# EAGLE board LED Driver R1.4 (10cm x 7cm) (EAGLE 6.2)
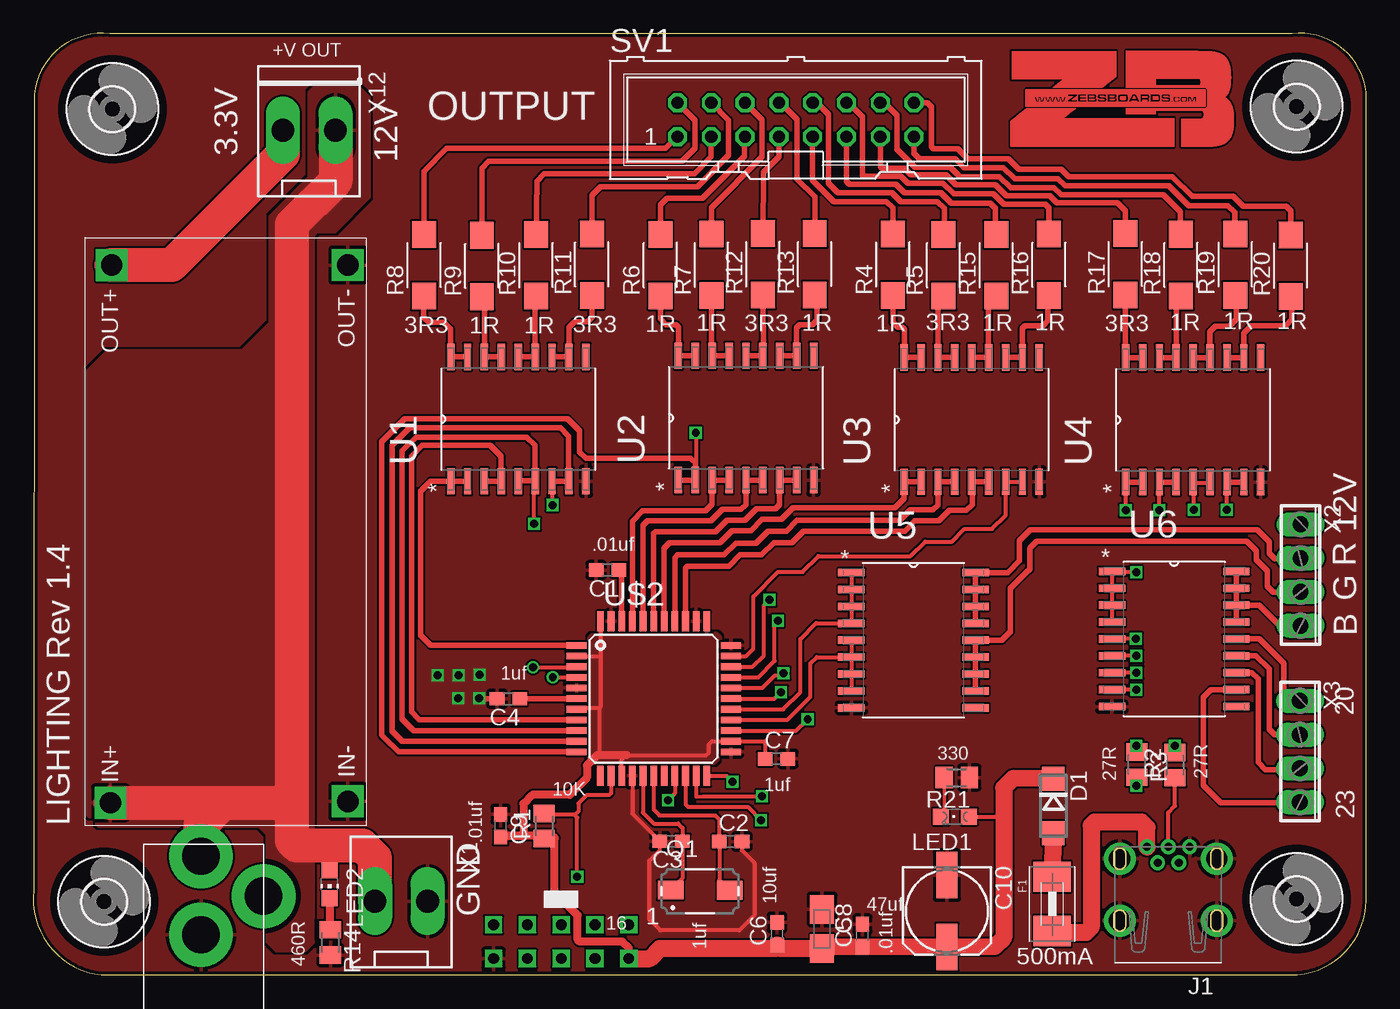
[diagram p0: board, top side]
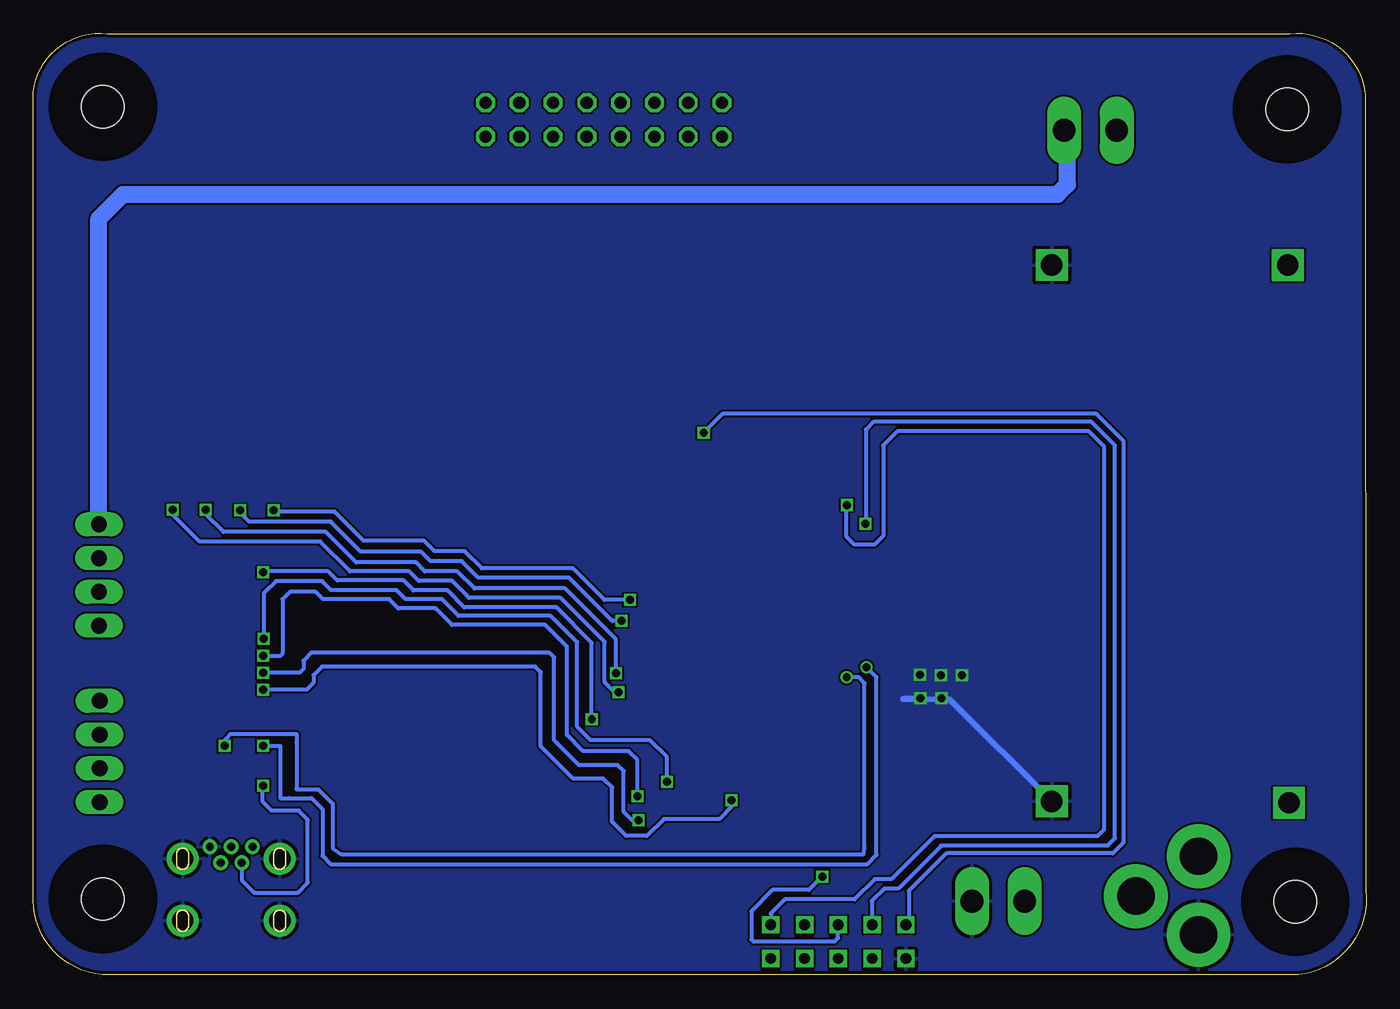
[diagram p1: board, bottom side, seen from below]

Size 100.2 x 70.75 mm. Coordinates in mm from the lower left corner, seen from the top.
Outline: 0.03,6.35 arc90 5.11,0 94.49,0 arc90 100.2,5.61 100.2,66.33 arc90 94.64,70.72 5.74,70.72 arc90 0.07,66.17 0.03,6.35
Copper layers (1*16): Top 0.035mm / dielectric 1.5mm / Bottom 0.035mm
Design rules: minimum track width 6mil, minimum drill 12mil, track to track 6mil, track to pad 6mil, pad to pad 6mil, via to via 6mil, smd to smd 0mil, copper to edge 10mil, drill to drill 10mil, minimum pad ring 10mil, minimum via ring 6mil, stop-mask expansion 2mil, vias tented up to drill 100mil, thermal gap 10mil

## Footprints (pad centres in the part's own frame; a part is rotated, then mirrored left to right if it is on the bottom)
C0603 = smd 1.1 x 1: 1 -0.85,0; 2 0.85,0
A/3216-18W = smd 2.15 x 1.8: + 1.475,0; - -1.475,0
153CLV-0605 = smd 3.5 x 1.6: + 2.7,0; - -2.7,0
DO214AC = smd 1.8 x 1.7: A 2.05,0; C -2.05,0
1812 = smd 2.286 x 2.794: 1 -2.046,0; 2 2.046,0
3,2 = hole 3.2: 0,0
651005136521 = drill 0.6: 1 1.6,-0.9; 2 0.8,0.3; 3 0,-0.9; 4 -0.8,0.3; 5 -1.6,-0.9 | drill 1.6: 6 -3.65,0; 7 -3.65,4.65; 8 3.65,4.65; 9 3.65,0
CHIPLED_0805 = smd 1.2 x 1.2: A 0,-1.05; C 0,1.05
CHIP-LED0805 = smd 1.2 x 1.2: A 0,-1.05; C 0,1.05
CTS406 = smd 1.9 x 1.4: 1 -2.2,0.07; 3 2.233,0.062
M0805 = smd 1.3 x 1.6: 1 -0.95,0; 2 0.95,0
R2010W = smd 2 x 1.8: 1 -2.311,0; 2 2.311,0
ML16 = drill 0.914 octagon: 1 -8.89,-1.27; 2 -8.89,1.27; 3 -6.35,-1.27; 4 -6.35,1.27; 5 -3.81,-1.27; 6 -3.81,1.27; 7 -1.27,-1.27; 8 -1.27,1.27; 9 1.27,-1.27; 10 1.27,1.27; 11 3.81,-1.27; 12 3.81,1.27; 13 6.35,-1.27; 14 6.35,1.27; 15 8.89,-1.27; 16 8.89,1.27
SOIC127P1030X265-18N = smd 1.981 x 0.559: 1 -4.674,5.08; 2 -4.674,3.81; 3 -4.674,2.54; 4 -4.674,1.27; 5 -4.674,0; 6 -4.674,-1.27; 7 -4.674,-2.54; 8 -4.674,-3.81; 9 -4.674,-5.08; 10 4.674,-5.08; 11 4.674,-3.81; 12 4.674,-2.54; 13 4.674,-1.27; 14 4.674,0; 15 4.674,1.27; 16 4.674,2.54; 17 4.674,3.81; 18 4.674,5.08
DC1CONVERTER = drill 1.6 square: IN+ 20.839,-9.498; IN- 20.736,8.343; OUT+ -19.563,-9.402; OUT- -19.567,8.343
TQFP44 = smd 1.5 x 0.5: 1 -5.8,4; 2 -5.8,3.2; 3 -5.8,2.4; 4 -5.8,1.6; 5 -5.8,0.8; 6 -5.8,0; 7 -5.8,-0.8; 8 -5.8,-1.6; 9 -5.8,-2.4; 10 -5.8,-3.2; 11 -5.8,-4; 23 5.8,-4; 24 5.8,-3.2; 25 5.8,-2.4; 26 5.8,-1.6; 27 5.8,-0.8; 28 5.8,0; 29 5.8,0.8; 30 5.8,1.6; 31 5.8,2.4; 32 5.8,3.2; 33 5.8,4 | smd 0.5 x 1.5: 12 -4,-5.8; 13 -3.2,-5.8; 14 -2.4,-5.8; 15 -1.6,-5.8; 16 -0.8,-5.8; 17 0,-5.8; 18 0.8,-5.8; 19 1.6,-5.8; 20 2.4,-5.8; 21 3.2,-5.8; 22 4,-5.8; 34 4,5.8; 35 3.2,5.8; 36 2.4,5.8; 37 1.6,5.8; 38 0.8,5.8; 39 0,5.8; 40 -0.8,5.8; 41 -1.6,5.8; 42 -2.4,5.8; 43 -3.2,5.8; 44 -4,5.8
10PICSP = drill 0.8 square: P$1 5.08,0; P$2 5.08,-2.54; P$3 2.54,0; P$4 2.54,-2.54; P$5 0,0; P$6 0,-2.54; P$7 -2.54,0; P$8 -2.54,-2.54; P$9 -5.08,0; P$10 -5.08,-2.54
PJ-102A = drill 2.8 pad 4.8: RING 0.1,-3.39; RING_SW -4.6,-6.29; TIP 0.1,-9.29
KK-156-2 = drill 1.7 pad 2.184 long: 1 -1.98,0; 2 1.98,0
4POL254 = drill 1.2 long: 1 -3.81,0; 2 -1.27,0; 3 1.27,0; 4 3.81,0

## Placement (x,y rotation side)
C1  0.1uf  [C0603]  43.16,30.42 180 top
C2  22pf  [C0603]  52.42,10.02 0 top
C3  22pf  [C0603]  47.95,10.05 180 top
C4  1uf  [C0603]  35.72,20.75 180 top
C5  1uf  [C0603]  62.32,2.96 90 top
C6  0.1uf  [C0603]  55.91,3.09 90 top
C7  1uf  [C0603]  55.87,16.23 0 top
C8  10uf  [A/3216-18W]  59.29,3.45 270 top
C9  0.1uf  [C0603]  35.12,11.21 270 top
C10  [153CLV-0605]  68.68,4.8 270 top
D1  [DO214AC]  76.67,12.7 270 top
F1  [1812]  76.59,5.33 270 top
H1  MOUNT-HOLE3.2  [3,2]  5.95,65.06 0 top
H2  MOUNT-HOLE3.2  [3,2]  5.32,5.5 0 top
H3  MOUNT-HOLE3.2  [3,2]  94.96,5.7 0 top
H4  MOUNT-HOLE3.2  [3,2]  94.96,65.24 0 top
J1  [651005136521]  85.32,8.73 180 top
LED1  [CHIPLED_0805]  69.29,11.89 90 top
LED2  [CHIP-LED0805]  22.27,6.82 180 top
Q1  16mhz  [CTS406]  50.11,6.3 0 top
R1  10K  [M0805]  38.4,11.19 90 top
R2  22  [M0805]  85.81,15.77 90 top
R3  22  [M0805]  82.96,15.79 270 top
R4  1R  [R2010W]  64.62,53.37 90 top
R5  3R3  [R2010W]  68.42,53.32 90 top
R6  1R  [R2010W]  47.13,53.33 90 top
R7  1R  [R2010W]  50.98,53.35 90 top
R8  3R3  [R2010W]  29.37,53.32 90 top
R9  1R  [R2010W]  33.72,53.27 90 top
R10  1R  [R2010W]  37.8,53.32 90 top
R11  3R3  [R2010W]  41.99,53.37 90 top
R12  3R3  [R2010W]  54.85,53.4 90 top
R13  1R  [R2010W]  58.74,53.4 90 top
R14  200  [M0805]  22.34,2.45 270 top
R15  1R  [R2010W]  72.38,53.32 90 top
R16  1R  [R2010W]  76.35,53.36 90 top
R17  3R3  [R2010W]  82.09,53.4 90 top
R18  1R  [R2010W]  86.27,53.34 90 top
R19  1R  [R2010W]  90.35,53.37 90 top
R20  1R  [R2010W]  94.51,53.29 90 top
R21  [M0805]  69.42,14.83 180 top
SV1  ML16E  [ML16]  57.31,64.26 0 top
U1  ULN2803ADW  [SOIC127P1030X265-18N]  36.46,41.76 90 top
U2  ULN2803ADW  [SOIC127P1030X265-18N]  53.57,41.85 90 top
U3  ULN2803ADW  [SOIC127P1030X265-18N]  70.54,41.72 90 top
U4  ULN2803ADW  [SOIC127P1030X265-18N]  87.18,41.71 90 top
U5  ULN2803ADW  [SOIC127P1030X265-18N]  66.16,25.15 0 top
U6  ULN2803ADW  [SOIC127P1030X265-18N]  85.76,25.24 0 top
U$1  DC1ACONVERTER  [DC1CONVERTER]  15.3,33.77 270 top
U$2  ATMEGA32U4-AU  [TQFP44]  46.63,20.76 0 top
U$3  [ZB_LOGO_SMALL_COPPER]  71.01,60.84 0 top
U$4  10PICSP  [10PICSP]  39.68,3.77 0 top
U$5  2.1MMJACKTHM  [PJ-102A]  12.7,-0.37 180 top
X1  [KK-156-2]  27.66,5.54 180 top
X2  [4POL254]  95.26,30.05 270 top
X3  [4POL254]  95.21,16.78 270 top
X12  [KK-156-2]  20.73,63.47 180 top

## Library data of the parts
C1-C3 C6 C9 F1 U$2 U$5 = adafruit
C4 C5 C7 C8 C10 R1-R21 = resistor
D1 = diode
H1-H4 = holes
J1 = Wurth_Elektronik_Electromechanic_Input-Output_Connectors_rev16b
LED1 LED2 = led
Q1 = crystal; OC_FARNELL: unknown; OC_NEWARK: unknown
SV1 = con-harting-ml; OC_FARNELL: unknown; OC_NEWARK: unknown
U1-U6 = ULNsmd; MPN: ULN2803ADW; OC_FARNELL: 1652419; OC_NEWARK: 69K0711; PACKAGE: SOIC-18; SUPPLIER: TEXAS INSTRUMENTS
U$1 = DC 1A Converter
U$3 = zebsboardslrg
U$4 = 10p ISCP
X1 X12 = con-molex; OC_FARNELL: unknown; OC_NEWARK: unknown
X2 X3 = con-phoenix-254; OC_FARNELL: unknown; OC_NEWARK: unknown

## Nets
+3V3: C1.1 U$2.42
+12V: LED2.A U$1.IN+ U$5.TIP X1.2 X2.1 X12.1
D1: U1.1 U1.2 U$2.1
D2: U1.3 U1.4 U$2.8
D3: U1.5 U1.6 U$2.9 U$4.P$7
D4: U1.7 U1.8 U$2.10 U$4.P$1
D5: U2.1 U2.2 U$2.11 U$4.P$9
D6: U2.3 U2.4 U$2.41
D7: U2.5 U2.6 U$2.40
D8: U2.7 U2.8 U$2.39
D9: U3.1 U3.2 U$2.38
D10: U3.3 U3.4 U$2.37
D11: U3.5 U3.6 U$2.36
D12: U3.7 U3.8 U$2.32
D13: U4.1 U4.2 U$2.31
D14: U4.3 U4.4 U$2.30
D15: U4.5 U4.6 U$2.29
D16: U4.7 U4.8 U$2.28
D17: U5.1 U5.2 U5.3 U5.4 U$2.27
D18: U5.5 U5.6 U5.7 U5.8 U$2.26
D19: U6.1 U6.2 U6.3 U6.4 U$2.25
D20: U6.5 U$2.22
D21: U6.6 U$2.21
D22: U6.7 U$2.20
D23: U6.8 U$2.19
D24: U$2.18
D25: U$2.12
D+: R2.2 U$2.4
D-: R3.1 U$2.3
GND: C1.2 C2.2 C3.2 C4.2 C5.2 C6.2 C7.2 C8.- C9.1 C10.- J1.5 J1.6 J1.7 J1.8 J1.9 R14.2 R21.1 U1.9 U2.9 U3.9 U4.9 U5.9 U6.9 U$1.IN- U$1.OUT- U$2.5 U$2.15 U$2.23 U$2.33 U$2.35 U$2.43 U$4.P$10 U$5.RING X1.1
N$1: R9.1 U1.15 U1.16
N$2: R8.2 SV1.1
N$3: R10.2 SV1.3
N$4: R11.1 U1.11 U1.12
N$5: R4.1 U3.17 U3.18
N$6: R5.2 SV1.10
N$7: R15.1 U3.13 U3.14
N$8: R8.1 U1.17 U1.18
N$9: R7.1 U2.15 U2.16
N$10: R6.2 SV1.5
N$11: R12.2 SV1.7
N$12: R13.1 U2.11 U2.12
N$13: R9.2 SV1.2
N$14: R10.1 U1.13 U1.14
N$15: R11.2 SV1.4
N$16: R6.1 U2.17 U2.18
N$17: R5.1 U3.15 U3.16
N$18: R4.2 SV1.9
N$19: R15.2 SV1.11
N$20: R16.1 U3.11 U3.12
N$21: R7.2 SV1.6
N$22: R12.1 U2.13 U2.14
N$23: R13.2 SV1.8
N$24: R16.2 SV1.12
N$25: R18.1 U4.15 U4.16
N$26: LED2.C R14.1
N$27: R17.2 SV1.13
N$28: R19.2 SV1.15
N$29: R20.1 U4.11 U4.12
N$30: R17.1 U4.17 U4.18
N$31: R18.2 SV1.14
N$32: R19.1 U4.13 U4.14
N$33: R20.2 SV1.16
N$34: C2.1 Q1.3 U$2.17
N$35: C3.1 Q1.1 U$2.16
N$36: C4.1 U$2.6
N$37: J1.2 R3.2
N$38: J1.3 R2.1
N$39: F1.2 J1.1
N$40: D1.A F1.1
N$41: LED1.C R21.2
N$42: U5.15 U5.16 U5.17 U5.18 X2.2
N$43: U5.11 U5.12 U5.13 U5.14 X2.3
N$44: U6.15 U6.16 U6.17 U6.18 X2.4
N$45: U6.14 X3.1
N$46: U6.13 X3.2
N$47: U6.12 X3.3
N$48: U6.11 X3.4
RST: R1.2 U$2.13 U$4.P$5
VCC: C5.1 C6.1 C7.1 C8.+ C9.2 C10.+ D1.C LED1.A R1.1 U$2.2 U$2.7 U$2.14 U$2.24 U$2.34 U$2.44 U$4.P$2
VDD: U$1.OUT+ X12.2

## Tracks (layer width: path | path; a pad name or v marks a point on that pad's centre or on a via)
+3V3
  Top 0.406: U$2.42 44.23,30.2 C1.1
+12V
  Top 0.305: LED2.A 21.96,9.7 21.98,9.71
  Top 0.406: 20.41,10.09 20.24,10.26 19.61,10.26 19.44,10.09
  Top 2.54: X12.1 22.71,59.65 19.44,56.38 19.44,13.13 | 19.44,13.13 19.44,10.09 19.81,9.71 21.98,9.71 24.74,9.71 25.68,8.77 X1.2 | U$1.IN+ 14.24,12.94 | 14.24,12.94 19.24,12.94 19.44,13.13 | U$5.TIP 12.57,11.26 14.24,12.94
  Bottom 1.27: X2.1 95.26,56.83 93.44,58.65 23.21,58.65 22.46,59.4 22.46,63.22 X12.1
  pour Top (isolate 0.406): 24.58,66.64 21.04,66.64 20.74,66.34 20.74,59.93 17.8,56.99 17.8,49 15.69,46.89 5.61,46.89 4.1,45.38 4.1,11.98 4.93,11.16 16.97,11.16 17.58,10.55 17.58,2.49 18.25,1.81 20.44,1.81 21.04,2.41 21.04,55.56 21.34,55.86 22.69,55.86 25.26,58.42 25.26,65.96 24.58,66.64
D1
  Top 0.406: U1.1 U1.2 29.85,37.09 29.11,36.35 29.11,25.54 29.86,24.78 40.81,24.78 U$2.1
D2
  Top 0.406: U1.3 U1.4 35.16,37.12 35.16,38.96 34.33,39.79 29.25,39.79 28.42,38.96 28.42,19.76 29.02,19.16 U$2.8
D3  (via drill 0.6)
  Top 0.305: v37.66,33.9 37.66,37.02 U1.6
  Top 0.406: U$2.9 28.58,18.36 27.73,19.21 27.73,39.38 28.77,40.41 37.08,40.41 37.7,39.79 37.7,37.11 | 37.7,37.11 U1.6 | 37.7,37.11 36.48,37.11 U1.5
  Bottom 0.305: v37.66,33.9 37.62,33.93 37.62,40.97 37.05,41.55 20.65,41.55 18.9,39.79 18.9,10.28 19.46,9.71 31.95,9.71 35.17,6.49 36.23,6.49 37.16,5.56 37.16,3.79 U$4.P$7
D4  (via drill 0.6)
  Top 0.305: v39.03,35.31 39.03,37.05 U1.7
  Top 0.406: U$2.10 27.73,17.56 26.98,18.31 26.98,39.79 28.28,41.1 39.62,41.1 40.24,40.48 40.24,37.11 U1.8 U1.7
  Bottom 0.305: v39.03,35.31 39.05,35.28 39.05,32.92 38.46,32.33 36.98,32.33 36.31,33 36.31,39.8 35.26,40.85 20.87,40.85 19.69,39.67 19.69,10.94 20.2,10.43 32.46,10.43 35.69,7.19 36.95,7.19 38.46,5.68 43.69,5.68 44.75,4.62 U$4.P$1
D5  (via drill 0.6)
  Top 0.305: v49.8,40.73 49.8,37.21 U2.2
  Top 0.406: U$2.11 27.46,16.76 26.34,17.87 | 26.34,17.87 | 26.34,17.87 26.18,18.04 26.18,40.05 27.93,41.8 40.18,41.8 41.08,40.9 41.08,39.27 41.54,38.81 49.42,38.81 49.76,38.47 U2.2 U2.1
  Bottom 0.305: v49.8,40.73 48.38,42.15 20.29,42.15 18.23,40.09 18.23,9.97 19.06,9.14 31.55,9.14 34.38,6.31 34.38,3.99 U$4.P$9
D6
  Top 0.406: U2.4 U2.3 51.03,35.37 50.53,34.86 45.8,34.86 45.04,34.1 U$2.41
D7
  Top 0.406: U$2.40 45.83,33.77 46.16,34.11 50.94,34.11 51.81,34.98 53.2,34.98 53.56,35.34 53.56,37.17 U2.5 U2.6
D8
  Top 0.406: U$2.39 46.63,33.18 46.76,33.31 51.29,33.31 52.13,34.15 53.48,34.15 54.36,35.02 55.79,35.02 56.11,35.34 U2.7 U2.8
D9
  Top 0.406: U$2.38 47.43,32.07 47.83,32.48 51.61,32.48 52.53,33.39 53.96,33.39 54.79,34.23 56.22,34.23 57.1,35.1 64.77,35.1 65.45,35.78 65.45,37.04 U3.1 U3.2
D10
  Top 0.406: U$2.37 48.23,31.36 48.43,31.56 51.93,31.56 52.81,32.44 54.32,32.44 55.23,33.35 56.62,33.35 57.42,34.15 65.13,34.15 65.93,34.94 67.64,34.94 68,35.3 U3.3 U3.4
D11
  Top 0.406: U$2.36 49.03,30.57 49.19,30.73 52.29,30.73 53.12,31.56 54.75,31.56 55.67,32.48 57.02,32.48 57.9,33.35 65.53,33.35 66.29,34.11 68.08,34.11 68.87,34.9 70.14,34.9 70.58,35.34 70.58,37.01 U3.5 U3.6
D12
  Top 0.305: U$2.32 53.58,23.96 54.13,24.51 54.13,28.43 55.98,30.29 57.84,30.29 59.01,31.46 65.95,31.46 67.05,32.56 69.04,32.56 70,33.52 72.07,33.52 73.1,34.56 73.1,37.03 U3.7 U3.8
D13  (via drill 0.6)
  Top 0.305: U$2.31 54.07,23.16 54.91,24 54.91,27.74 v55.35,28.18 | v82.12,34.91 82.12,37.02 U4.1
  Top 0.406: U4.1 U4.2
  Bottom 0.305: v55.35,28.18 57.27,28.18 59.64,30.55 66.47,30.55 67.76,31.83 70.03,31.83 70.83,32.63 75.38,32.63 77.56,34.81 82.02,34.81 v82.12,34.91
D14  (via drill 0.6)
  Top 0.305: U$2.30 54.5,22.36 55.73,23.59 55.73,26.36 v55.97,26.6 | v84.65,34.91 U4.3
  Top 0.406: U4.3 U4.4
  Bottom 0.305: v55.97,26.6 56.68,26.6 59.93,29.85 66.75,29.85 68,31.09 70.33,31.09 71.05,31.81 75.58,31.81 77.83,34.05 83.98,34.05 84.65,34.72 v84.65,34.91
D15  (via drill 0.6)
  Top 0.305: v87.23,34.96 87.23,36.99 | 87.23,36.99 U4.5 | 87.23,36.99 88.41,36.99 U4.6 | U$2.29 54.8,21.56 55.75,22.51 56.26,22.51 v56.4,22.65
  Bottom 0.305: v56.4,22.65 56.4,25.22 60.22,29.04 67.04,29.04 68.33,30.33 70.76,30.33 71.43,31 75.92,31 78.21,33.29 85.89,33.29 87.18,34.58 87.18,34.91 v87.23,34.96
D16  (via drill 0.6)
  Top 0.305: U$2.28 55.71,20.76 v56.2,21.25 | v89.71,34.94 89.71,37.02 U4.7
  Top 0.406: U4.7 U4.8
  Bottom 0.305: v56.2,21.25 56.5,21.25 57.26,22 57.26,25.03 60.56,28.34 67.44,28.34 68.71,29.61 71.22,29.61 71.93,30.33 76.39,30.33 78.61,32.55 87.68,32.55 89.71,34.59 v89.71,34.94
D17
  Top 0.305: U5.1 U5.2 U5.3 U5.4 58.85,26.43 57.66,25.23 57.66,21.25 56.36,19.96 U$2.27
D18
  Top 0.305: U5.6 U5.7 U5.8 | U5.5 U5.6 | U$2.26 56.68,19.16 58.41,20.89 58.41,23.4 58.89,23.88 U5.6
D19  (via drill 0.6)
  Top 0.305: U$2.25 57.35,18.36 v58.21,19.22 | v82.91,30.25 81.16,30.25 U6.1 U6.2 U6.3 U6.4
  Bottom 0.305: v58.21,19.22 58.21,24.96 60.88,27.62 67.8,27.62 69.07,28.89 71.61,28.89 72.37,29.65 77.34,29.65 78.02,30.33 82.83,30.33 v82.91,30.25
D20  (via drill 0.6)
  Top 0.305: U$2.22 52.12,14.96 v52.57,14.5 | v82.89,25.24 U6.5
  Bottom 0.305: v52.57,14.5 52.57,16.38 53.84,17.65 58.32,17.65 59.31,18.64 59.31,25 61.3,26.98 68.23,26.98 69.47,28.23 72.2,28.23 72.89,28.92 77.81,28.92 78.47,29.58 81.95,29.58 82.86,28.67 82.86,25.27 v82.89,25.24
D21  (via drill 0.6)
  Top 0.305: U$2.21 49.83,13.4 50.36,13.42 v54.78,13.42 | v82.92,23.97 U6.6 | U6.6
  Bottom 0.305: v54.78,13.42 54.78,16.16 55.44,16.82 58.87,16.82 60.08,18.04 60.08,24.66 61.71,26.29 68.72,26.29 69.97,27.54 72.76,27.54 73.45,28.23 78.41,28.23 78.97,28.78 80.9,28.78 81.45,28.23 81.45,24.14 81.65,23.95 82.8,23.95 v82.92,23.97
D22  (via drill 0.6)
  Top 0.305: U$2.20 49.03,12.81 49.23,12.62 53.72,12.62 v54.71,11.62 | v82.92,22.71 U6.7
  Bottom 0.305: v54.71,11.62 55.19,11.62 55.83,12.26 55.83,15.32 56.27,15.76 59.17,15.76 61.04,17.63 61.04,23.86 61.38,24.2 79.31,24.2 79.88,23.62 79.88,22.99 80.17,22.71 v82.92,22.71
D23  (via drill 0.6)
  Top 0.305: U$2.19 48.23,13.63 v47.71,13.12 | v82.91,21.44 U6.8
  Bottom 0.305: v47.71,13.12 47.71,12.62 48.63,11.71 52.79,11.71 54.06,10.44 55.64,10.44 56.69,11.49 56.69,14.09 57.35,14.75 59.61,14.75 62.06,17.2 62.06,22.76 62.46,23.16 78.5,23.16 79.13,22.53 79.13,21.95 79.64,21.44 v82.91,21.44
D+  (via drill 0.6)
  Top 0.305: R2.2 v85.81,17.21 | v85.81,17.21 | v39.05,22.37 40.82,22.37 U$2.4
  Bottom 0.305: v85.81,17.21 85.81,17.62 85.61,17.83 | 85.61,17.83 | 85.61,17.83 85.37,18.11 80.4,18.11 80.4,17.45 80.4,13.97 80.38,13.95 78.77,13.95 77.68,12.87 77.68,9.51 77.07,9.08 37.79,9.08 37.72,9.55 37.72,21.93 38.13,22.35 39.03,22.35 v39.05,22.37
D-  (via drill 0.6)
  Top 0.305: R3.1 82.96,17.18 v82.93,17.21 | v37.56,23.13 40.8,23.13 U$2.3
  Bottom 0.305: v82.93,17.21 81.62,17.21 81.62,13.3 81.6,13.28 80.94,13.28 80.93,13.29 79.28,13.29 78.46,12.46 78.46,8.95 77.84,8.33 37.49,8.33 36.81,9.02 36.81,22.37 v37.56,23.13
GND  (via drill 0.6)
  Top 0.305: U$2.15 45.03,12.12 C3.2 47.1,9.38 46.32,8.6 46.32,4.17 47.14,3.35 53.08,3.35 54.2,4.47 54.2,8.42 53.27,9.35 C2.2
  Top 0.406: C4.2 33.55,20.75 v33.51,20.79
  Bottom 0.406: v33.51,20.79 34.74,20.79 34.81,20.72 31.32,20.72 U$1.IN-
  other vias: 33.53,22.56 30.38,22.52 31.96,22.53 31.93,20.79
  pour Bottom (rank 3): -0.86,71.27 101.99,71.27 101.99,-1.54 -0.87,-1.54 -0.87,71.26
  pour Top (rank 2): -1.02,71.9 102.73,71.69 102.73,-1.07 -1.14,-1.07 -1.14,71.7
N$1
  Top 0.406: R9.1 33.92,51.49 U1.16 U1.15
N$2
  Top 0.406: R8.2 29.37,60.4 31.08,62.1 47.53,62.1 SV1.1
N$3
  Top 0.406: R10.2 37.85,59.65 38.41,60.21 49.69,60.21 50.95,61.47 50.95,62.98 SV1.3
N$4
  Top 0.406: U1.12 U1.11 40.27,48.65 40.7,49.08 41.67,49.08 42.02,49.43 42.02,51.66 R11.1
N$5
  Top 0.406: R4.1 64.62,49.04 64.98,48.68 65.33,48.68 65.5,48.51 65.5,46.44 U3.18 U3.17
N$6
  Top 0.406: SV1.10 58.91,65.53 59.76,64.67 59.76,59.5 60.48,58.78 64.54,58.78 65.21,58.11 67.96,58.11 68.47,57.59 68.47,56.26 R5.2
N$7
  Top 0.406: U3.14 U3.13 71.81,51.01 R15.1
N$8
  Top 0.406: U1.17 U1.18 31.38,48.5 30.85,49.02 29.7,49.02 29.36,49.37 29.36,51.67 R8.1
N$9
  Top 0.406: R7.1 50.98,46.58 U2.16 U2.15
N$10
  Top 0.406: R6.2 47.13,57.88 47.63,58.37 50.32,58.37 53.47,61.52 53.47,62.96 SV1.5
N$11
  Top 0.406: R12.2 54.91,60.33 56.05,61.47 SV1.7
N$12
  Top 0.406: U2.12 U2.11 57.38,48.64 57.59,48.85 58.57,48.85 58.91,49.2 58.91,51.39 R13.1
N$13
  Top 0.406: R9.2 33.72,60.61 34.23,61.12 48.77,61.12 49.75,62.1 49.75,64.21 SV1.2
N$14
  Top 0.406: U1.14 U1.13 37.73,51.56 R10.1
N$15
  Top 0.406: R11.2 41.99,58.57 42.65,59.23 49.92,59.23 52.27,61.58 52.27,64.23 SV1.4
N$16
  Top 0.406: R6.1 47.13,49.29 47.57,48.85 48.32,48.85 48.49,48.68 U2.18 U2.17
N$17
  Top 0.406: R5.1 68.23,51.59 68.02,51.38 68.02,46.42 U3.16 U3.15
N$18
  Top 0.406: SV1.9 58.58,59.72 60.2,58.11 64.14,58.11 64.62,57.63 64.62,56.21 R4.2
N$19
  Top 0.406: SV1.11 61.12,59.65 61.36,59.42 64.85,59.42 65.49,58.78 68.23,58.78 69.03,57.99 71.93,57.99 72.33,57.59 72.33,56.26 R15.2
N$20
  Top 0.406: U3.12 U3.11 74.35,48.6 74.55,48.8 75.92,48.8 76.27,49.14 76.27,51.33 R16.1
N$21
  Top 0.406: R7.2 50.98,57.66 54.79,61.47 54.79,64.25 SV1.6
N$22
  Top 0.406: U2.14 U2.13 54.91,46.59 R12.1
N$23
  Top 0.406: SV1.8 56.17,65.53 57.42,64.28 57.42,59.8 58.74,58.48 58.74,56.18 R13.2
N$24
  Top 0.406: SV1.12 61.29,65.53 62.27,64.55 | 62.27,64.55 | 62.27,64.55 62.31,64.51 62.31,60.1 62.39,60.02 65.21,60.02 65.73,59.5 68.39,59.5 69.19,58.7 72.17,58.7 72.97,57.91 76.07,57.91 76.35,57.63 76.35,56.04 R16.2
N$25
  Top 0.406: U4.16 U4.15 85.91,50.88 R18.1
N$26
  Top 0.61: LED2.C 22.27,3.43 R14.1
N$27
  Top 0.406: SV1.13 63.66,60.73 63.78,60.61 65.49,60.61 65.97,60.14 68.59,60.14 69.35,59.38 72.33,59.38 73.17,58.54 76.43,58.54 76.94,58.03 81.48,58.03 82.07,57.43 82.07,55.99 R17.2
N$28
  Top 0.406: SV1.15 66.2,61.74 66.61,61.33 69.3,61.33 69.97,60.67 72.94,60.67 73.77,59.84 77.03,59.84 77.56,59.31 85.36,59.31 86.86,57.81 89.8,57.81 90.31,57.31 90.31,55.88 R19.2
N$29
  Top 0.406: U4.12 U4.11 90.99,48.23 91.56,48.8 94.13,48.8 94.59,49.25 94.59,51.1 R20.1
N$30
  Top 0.406: R17.1 82.09,46.39 U4.18 U4.17
N$31
  Top 0.406: SV1.14 64,65.53 64.93,64.59 64.93,62.04 66.27,60.7 68.93,60.7 69.65,59.98 72.63,59.98 73.47,59.14 76.73,59.14 77.27,58.61 84.96,58.61 86.21,57.36 86.21,55.81 R18.2
N$32
  Top 0.406: U4.14 U4.13 88.45,48.33 88.87,48.74 89.9,48.74 90.41,49.25 90.41,51.16 R19.1
N$33
  Top 0.406: SV1.16 67.22,65.53 67.51,65.24 67.51,62.23 67.68,62.06 69.5,62.06 70.24,61.31 73.31,61.31 74.08,60.54 77.28,60.54 77.84,59.99 85.62,59.99 87.11,58.5 90.2,58.5 90.95,57.75 94.18,57.75 94.51,57.42 94.51,55.81 R20.2
N$34
  Top 0.305: U$2.17 46.63,12.43 47.07,11.99 51.25,11.99 51.54,11.71 51.54,10.06 C2.1 51.57,7.13 Q1.3
N$35
  Top 0.305: U$2.16 45.83,12.19 46.65,11.37 48.48,11.37 48.81,11.03 48.81,10.07 C3.1 48.8,7.25 Q1.1
N$36
  Top 0.406: C4.1 40.82,20.75 U$2.6
N$37  (via drill 0.6)
  Top 0.305: v82.92,14.22 82.92,14.91 R3.2
  Bottom 0.305: J1.2 84.52,7.12 83.59,6.19 80.3,6.19 79.56,6.93 79.56,11.65 80.25,12.35 82.29,12.35 82.95,13.01 82.95,14.2 v82.92,14.22
N$38
  Top 0.305: J1.3 85.32,12.2 85.82,12.71 85.82,14.91 R2.1
N$39
  Top 1.27: J1.1 83.72,11.07 83.31,11.47 79.77,11.47 79.53,11.24 79.53,3.58 79.14,3.18 76.69,3.18 F1.2
N$40
  Top 1.27: D1.A 76.58,7.39 F1.1
N$41
  Top 0.254: R21.2 68.47,12.12 LED1.C
N$42
  Top 0.406: U5.15 U5.16 U5.17 U5.18 73.25,30.23 74.13,31.11 74.13,32.63 74.95,33.45 92,33.45 92.89,32.56 92.89,31.66 93.31,31.25 95.19,31.25 X2.2
N$43
  Top 0.406: X2.3 95.24,28.76 93.21,28.76 92.77,29.2 92.77,30.35 91.94,31.18 91.94,31.86 91.22,32.58 75.43,32.58 74.92,32.06 74.92,30.47 74.8,30.35 74.76,30.35 73.44,29.04 73.44,25.77 72.82,25.15 U5.14 U5.13 U5.12 U5.11
N$44
  Top 0.406: U6.18 U6.17 U6.16 | U6.16 U6.15 | X2.4 93.7,26.24 92.17,27.76 90.45,27.76 U6.16
N$45
  Top 0.406: U6.14 92.15,25.24 93.65,23.75 93.99,23.41 93.99,20.93 94.41,20.51 95.13,20.51 X3.1
N$46
  Top 0.406: U6.13 91.91,23.97 92.89,22.99 92.89,18.45 93.31,18.04 95.2,18.04 X3.2
N$47
  Top 0.406: U6.12 91.6,22.7 92.07,22.23 92.07,15.97 92.62,15.42 95.12,15.42 X3.3
N$48
  Top 0.406: U6.11 88.52,21.43 87.94,20.86 87.94,14.25 89.25,12.94 95.18,12.94 X3.4
RST  (via drill 0.6)
  Top 0.305: U$2.13 43.43,13.65 43.29,13.51 41.61,13.51 40.98,12.89 40.98,12.29 40.73,12.04 40.68,12.04 | 40.68,12.04 38.4,12.04 R1.2 | v40.89,7.39 40.89,11.82 40.68,12.04
  Bottom 0.305: v40.89,7.39 41.05,7.24 41.05,7.23 41.9,6.38 44.61,6.38 46.22,4.77 46.22,2.67 46.08,2.53 39.95,2.53 39.7,2.78 39.7,3.76 U$4.P$5
VCC
  Top 0.152: C9.2 35.59,10.16 35.59,10.41
  Top 0.254: 59.3,2.03 C8.+ 62.34,1.98 C5.1 68.68,2.07 C10.+ | 42.55,20.02 42.55,16.68 42.38,16.52
  Top 0.305: U$2.14 44.23,16.15 44.59,16.52 50.59,16.52 50.78,16.71 50.78,17.32 51.03,17.57 52.42,17.57 U$2.24 55,17.56 55.02,17.55 C7.1 | U$2.44 42.63,23.91 | 42.63,23.91 42.63,20.1 42.55,20.02 40.89,20.02 U$2.7 | U$2.2 42.58,23.96 42.63,23.91 | LED1.A 72.91,11.89 72.94,11.92
  Top 0.406: C9.2 38.47,10.36 R1.1
  Top 0.61: 44.59,16.52 42.38,16.52 41.62,15.75 41.62,14.82 40.32,13.53 37.51,13.53 36.84,12.87 36.84,10.41 35.59,10.41 35.19,10.41 35.12,10.48 38.4,10.48 38.53,10.35 39.14,10.35 | 39.14,10.35 39.14,10.34 | U$4.P$2 44.76,2.01 44.27,2.5 41.07,2.5 40.92,2.65 40.92,4.49 39.19,6.22 39.19,10.29 39.14,10.35
  Top 1.27: D1.C 73.67,14.78 72.94,14.05 72.94,11.92 72.94,2.81 72.26,2.12 59.4,2.08 C8.+ 56.18,1.98 C6.1 | C6.1 55.91,2.11 55.79,1.99 | U$4.P$2 46.34,1.23 47.1,1.99 55.66,1.99 C6.1
  pour Top: 42.35,25.91 51.09,25.91 51.61,25.39 51.61,16.36 50.94,15.68 42.35,15.68 41.67,16.36 41.67,25.24 42.35,25.92
VDD
  Top 2.54: X12.2 18.75,61.67 10.4,53.33 5.91,53.33 U$1.OUT+

## Text on the board
tPlace: +V OUT | OUTPUT | 3.3V | 12V | 3R3 | 1R | 1R | 3R3 | 1R | 1R | 3R3 | 1R | 1R | 3R3 | 1R | 1R | 1R | 3R3 | 1R | 1R | .01uf | 12V | R | G | B | 1uf | 20 | 330 | 1uf | 27R | 27R | 10K | .01uf | 23 | LIGHTING Rev 1.4 | 10uf | 47uf | .01uf | GND | 16 | 1uf | 460R | 500mA